# EAGLE board I2C_header (EAGLE 9.6.2)
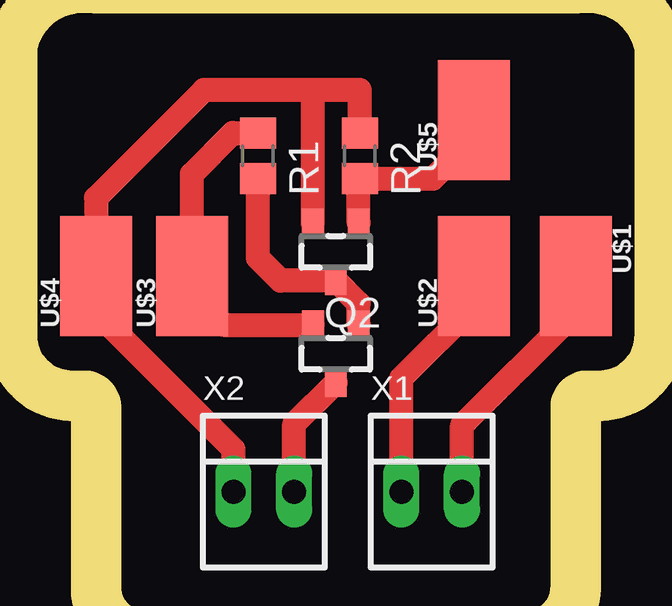
[diagram p0: board, top side]

No outline drawn. Coordinates in mm, seen from the top.
Copper layers (1*16): Top 0.035mm / dielectric 0.15mm / Bottom 0.035mm
Design rules "default *": minimum track width 6mil, minimum drill 0.35mm, track to track 6mil, track to pad 6mil, pad to pad 6mil, via to via 6mil, smd to smd 6mil, copper to edge 0mil, drill to drill 6mil, minimum pad ring 10mil, minimum via ring 8mil, stop-mask expansion 4mil, vias tented up to drill 0mil, thermal gap 10mil
Milling: 16 lines

## Footprints (pad centres in the part's own frame; a part is rotated, then mirrored left to right if it is on the bottom)
SOT-23-3 = smd 0.9 x 1.2: 1 -0.95,-1.2; 2 0.95,-1.2; 3 0,1.2
SMD_0805 = smd 1.3 x 1.5: 1 -0.95,0; 2 0.95,0
PAD3X5 = smd 5 x 3: P$1 0,0
22-23-2021 = drill 1 long: 1 -1.27,0; 2 1.27,0

## Placement (x,y rotation side)
Q1  BSS84  [SOT-23-3]  10,10.75 180 top
Q2  BSS138  [SOT-23-3]  10,15 180 top
R1  [SMD_0805]  6.75,19 270 top
R2  [SMD_0805]  11,19 270 top
U$1  PAD3.0X5.0  [PAD3X5]  20,14 270 top
U$2  PAD3.0X5.0  [PAD3X5]  15.75,14 90 top
U$3  PAD3.0X5.0  [PAD3X5]  4,14 90 top
U$4  PAD3.0X5.0  [PAD3X5]  0,14 90 top
U$5  PAD3.0X5.0  [PAD3X5]  15.75,20.5 90 top
X1  22-23-2021  [22-23-2021]  14,5 0 top
X2  22-23-2021  [22-23-2021]  7,5 0 top

## Library data of the parts
Q1 Q2 R1 R2 U$1-U$5 = SIG_Parts
X1 X2 = con-molex; MF: MOLEX; MPN: 22-23-2021; OC_FARNELL: 1462926; OC_NEWARK: 25C3832

## Nets
+3V3: Q1.2 R1.1 U$3.P$1
GND: Q2.2 R2.1 U$4.P$1 X2.1
N$1: Q1.3 X2.2
N$2: Q1.1 Q2.3 R1.2
PWR_ON: Q2.1 R2.2 U$5.P$1
SCL: U$1.P$1 X1.2
SDA: U$2.P$1 X1.1

## Tracks (layer width: path | path; a pad name or v marks a point on that pad's centre or on a via)
+3V3
  Top 1: R1.1 5.7,19.95 4,18.25 U$3.P$1 3.62,13.62 4,13.25 5.3,11.95 Q1.2
GND
  Top 1: Q2.2 9.05,21.7 | 9.05,21.7 9.05,21.75 11,21.75 R2.1 | 9.05,21.7 9,21.75 4.5,21.75 0,17.25 U$4.P$1 0,12.5 5.73,6.77 X2.1
N$1
  Top 1: X2.2 8.27,7.82 Q1.3
N$2
  Top 1: Q1.1 10.95,12.85 Q2.3 7.7,13.8 6.75,14.75 R1.2
PWR_ON
  Top 1: Q2.1 10.95,18 R2.2 14.05,18.05 15.75,19.75 U$5.P$1
SCL
  Top 1: X1.2 15.27,7.77 20,12.5 U$1.P$1
  pour Top (isolate 0.3): 18.97,11.97 18.7,13.7 18.7,15.98 19.71,15.98 19.71,14.7 20.99,13.49
SDA
  Top 1: X1.1 12.73,9.73 15.75,12.75 U$2.P$1
  pour Top (isolate 0.3): 15.25,12.62 15.25,15 16.5,15 16.5,13.25